# Altium PCB PCB1.PcbDoc
Units mm, origin at the board's own origin, x right, y up, seen from the top; angles counter-clockwise.
Board outline 152.4 x 101.6 mm, 2 copper layers (Top Layer, Bottom Layer); 25 components, 56 nets, 148 pads, 1 vias.
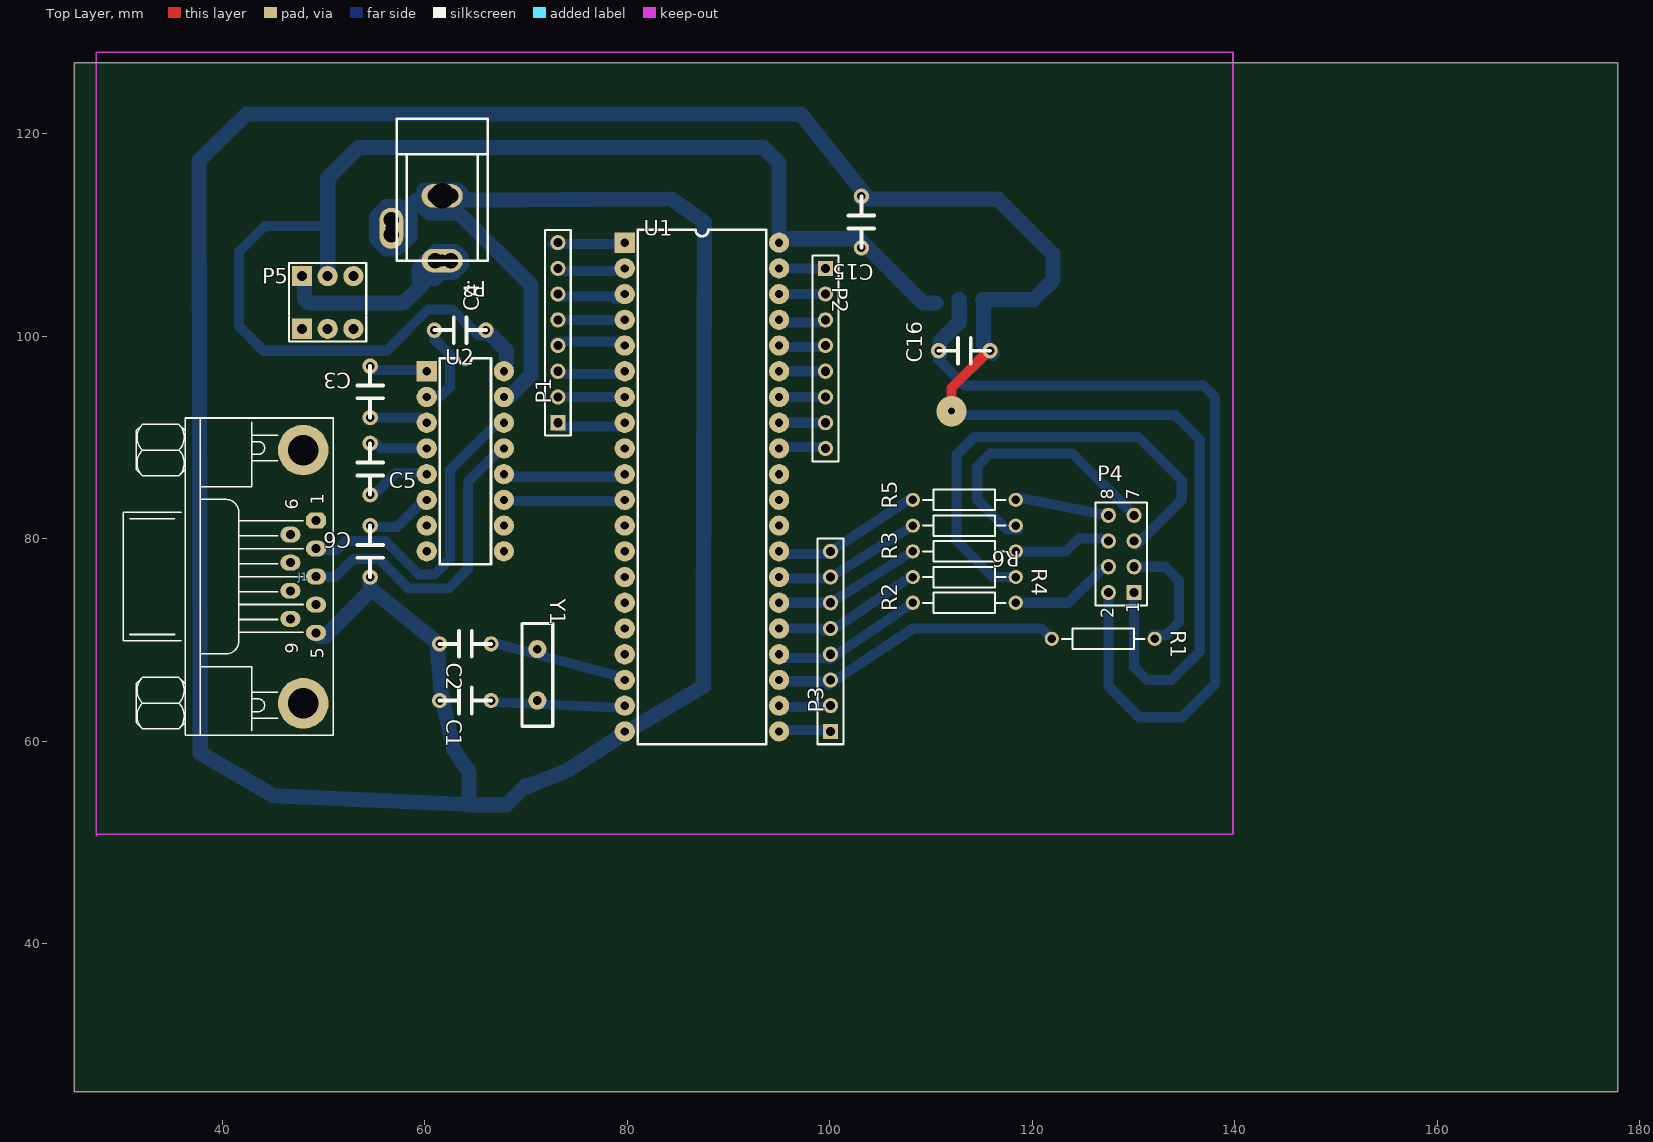
[diagram p0: Top Layer view]
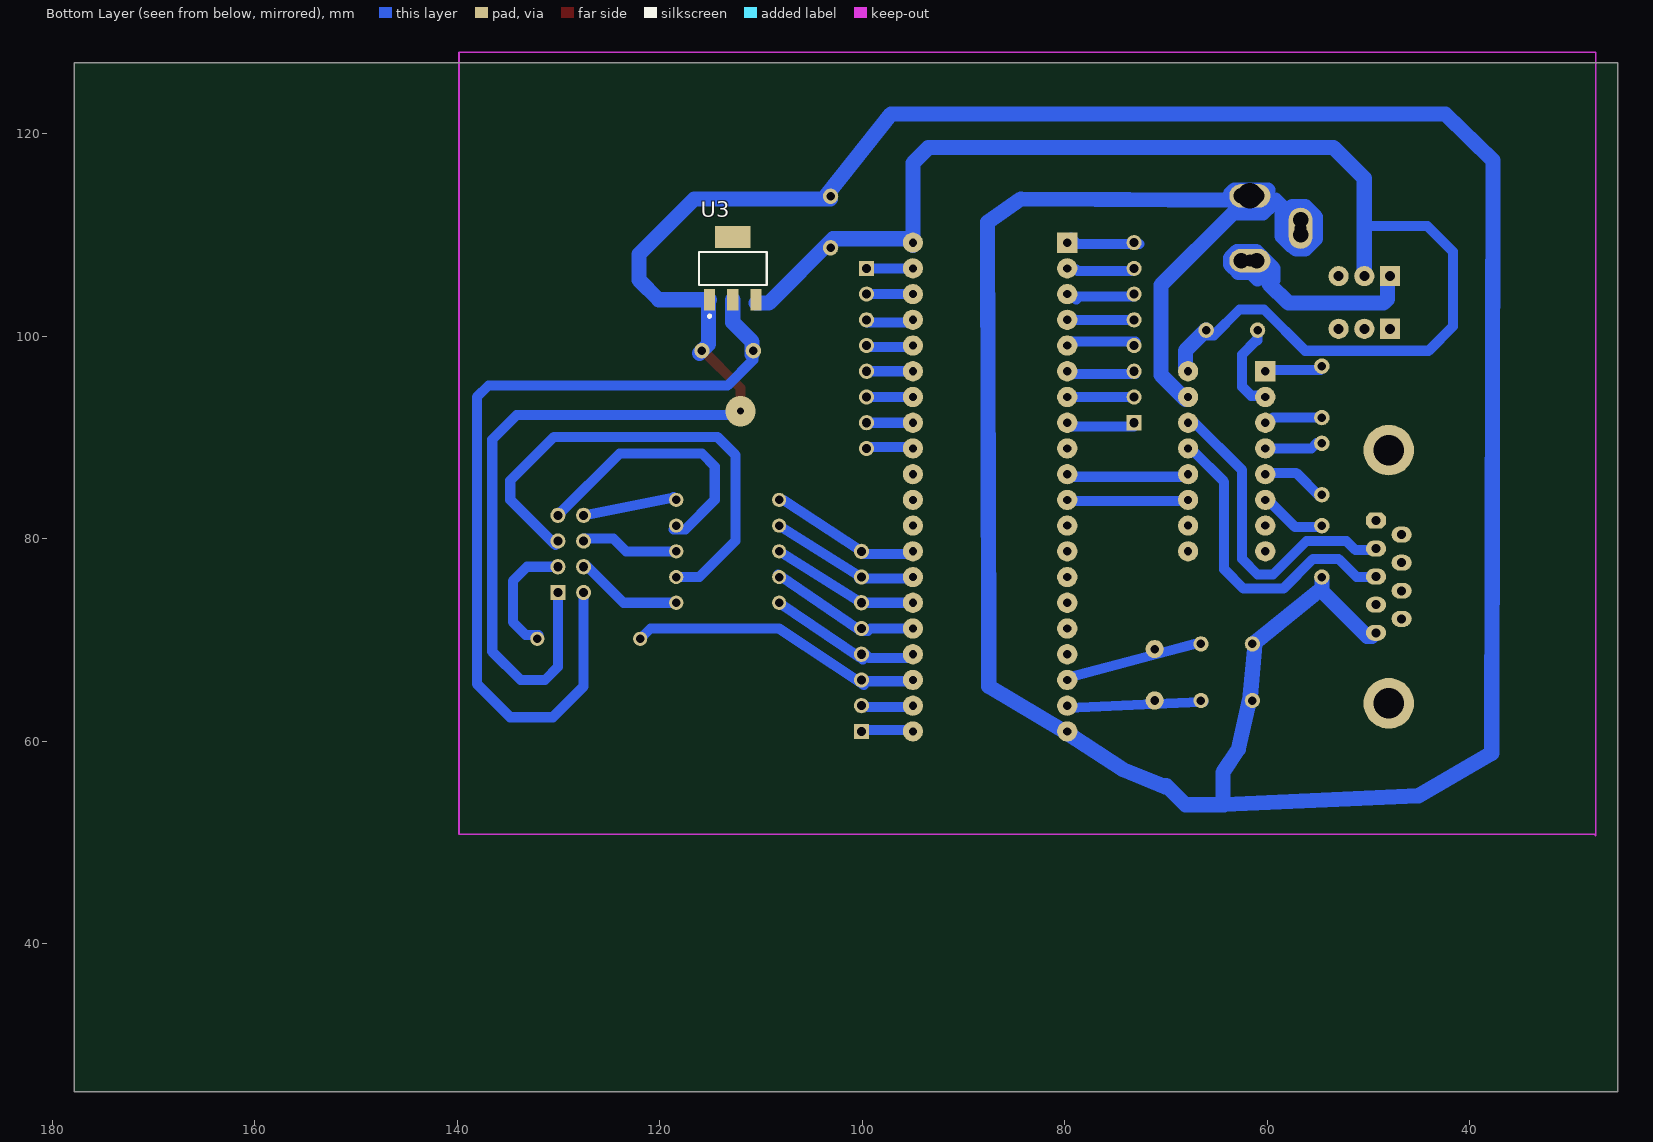
[diagram p1: Bottom Layer view, seen from below]

## Layer stack, top to bottom
Top Layer: signal copper 0.0356
Dielectric: dielectric 0.32, FR-4, Dk 4.8
Bottom Layer: signal copper 0.0356

## Board outline
25.4,25.4 177.8,25.4 177.8,127 25.4,127

## Design rules (kind name [scope] priority, off if disabled: settings)
Clearance [All] p1: gap=0.254
ComponentClearance [All] p1: gap=0.254 collisioncheckmode=3 verticalgap=0.254
PolygonConnect [All] p1: connectstyle=Relief reliefconductorwidth=0.254 reliefentries=4 polygonreliefangle="90 Angle"
RoutingVias [All] p1: holewidth=0.711 width=1.27 viastyle="Through Hole" minholewidth=0.711 minwidth=1.27 maxholewidth=0.711 maxwidth=1.27
SolderMaskExpansion [All] p1: expansion=0.102
TestPointUsage [All] p1: valid=0 allowmultiple=FALSE
Testpoint [All] p1: side=15 testpointundercomponent=TRUE minsize=1.016 maxsize=2.54 preferedsize=1.524 minholesize=0 maxholesize=1.016 preferedholesize=0.813 testpointgrid=0.025 style=1023 order=0-112345678
Width [All] p1: maxlimit=5 minlimit=0.254 preferedwidth=0.254 minimp=50.000000 maximp=50.000000 favimp=50.000000
18 further rules are at their usual default settings.

## Components (designator, comment, footprint, x,y, rotation, side; value= is the part's Value field where it differs from the comment)
C1 "33pF" c0.2 61.468,64.008 r270 top
C2 "33pF" c0.2 61.468,69.596 r270 top
C3 "0.1uF" C0.2 54.61,97.028 r180 top
C4 "0.1uF" C0.2 66.04,100.584 r90 top
C5 "0.1uF" C0.2 54.61,84.328 r0 top
C6 "0.1uF" C0.2 54.61,81.28 r180 top
C15 "33pF" c0.2 103.124,113.792 r180 top
C16 "33pF" c0.2 115.824,98.552 r90 top
J1 "DB9" RS232 49.276,81.788 r180 top
P1 "Header 8" HDR1X8 73.152,91.44 r90 top
P2 "Header 8" HDR1X8 99.568,106.68 r270 top
P3 "Header 8" HDR1X8 100.076,60.96 r90 top
P4 "Header 4X2" HDR2X4 130.048,74.676 r90 top
P5 "Header 3X2" KZ 48.26,116.332 r0 top
P? "Header 3" Power_In 64.008,114.3 r270 top
R1 "Res2" AXIAL-0.4 127,70.104 r0 top
R2 "Res2" AXIAL-0.4 113.284,73.66 r180 top
R3 "Res2" AXIAL-0.4 113.284,78.74 r180 top
R4 "Res2" AXIAL-0.4 113.284,76.2 r0 top
R5 "Res2" AXIAL-0.4 113.284,83.82 r180 top
R6 "Res2" AXIAL-0.4 113.284,81.28 r0 top
U1 "8031" DIP40 79.756,109.22 r0 top
U2 "MAX232-2" DIP16 60.198,96.52 r0 top
U3 "AMS1117" SOT223 112.776,106.68 r180 bottom
Y1 "11.0596MHz" XTAL-1 71.12,69.088 r270 top

## Footprints (in the part's own frame and the unit in brackets; to place one, negate y for a bottom-side part, rotate by r counter-clockwise, add the part's x,y. Pads: shape width x height; smd on the part's side, far side on the other; paste and mask are expansions set on the pad)
AXIAL-0.4 [mm] "Resistor; 2 Leads"
  round 1.4 hole 0.85: 1(-5.08,0) 2(5.08,0)
  silkscreen extent -4.06,-1.02 4.06,1.02
c0.2 [mil]
  round 60 hole 33: 1(0,0) 2(0,200)
  silkscreen extent -50,0 50,200
C0.2 [mil]
  round 60 hole 33: 1(0,0) 2(0,200)
  silkscreen extent -50,0 50,200
DIP16 [mm]
  rect 2x2 hole 0.813: 1(0,0)
  round 2 hole 0.813: 2(0,-2.54) 3(0,-5.08) 4(0,-7.62) 5(0,-10.16) 6(0,-12.7) 7(0,-15.24) 8(0,-17.78) 9(7.62,-17.78) 10(7.62,-15.24) 11(7.62,-12.7) 12(7.62,-10.16) 13(7.62,-7.62) 14(7.62,-5.08) 15(7.62,-2.54) 16(7.62,0)
  silkscreen extent 1.27,-19.05 6.35,1.27
DIP40 [mm]
  rect 2x2 hole 0.813: 1(0,0)
  round 2 hole 0.813: 2(0,-2.54) 3(0,-5.08) 4(0,-7.62) 5(0,-10.16) 6(0,-12.7) 7(0,-15.24) 8(0,-17.78) 9(0,-20.32) 10(0,-22.86) 11(0,-25.4) 12(0,-27.94) 13(0,-30.48) 14(0,-33.02) 15(0,-35.56) 16(0,-38.1) 17(0,-40.64) 18(0,-43.18) 19(0,-45.72) 20(0,-48.26) 21(15.24,-48.26) 22(15.24,-45.72) 23(15.24,-43.18) 24(15.24,-40.64) 25(15.24,-38.1) 26(15.24,-35.56) 27(15.24,-33.02) 28(15.24,-30.48) 29(15.24,-27.94) 30(15.24,-25.4) 31(15.24,-22.86) 32(15.24,-20.32) 33(15.24,-17.78) 34(15.24,-15.24) 35(15.24,-12.7) 36(15.24,-10.16) 37(15.24,-7.62) 38(15.24,-5.08) 39(15.24,-2.54) 40(15.24,0)
  silkscreen extent 1.27,-49.53 13.97,1.27
HDR1X8 [mm] "Connector; Header; 8 Position"
  rect 1.5x1.5 hole 0.9: 1(0,0)
  round 1.5 hole 0.9: 2(2.54,0) 3(5.08,0) 4(7.62,0) 5(10.16,0) 6(12.7,0) 7(15.24,0) 8(17.78,0)
  silkscreen extent -1.27,-1.27 19.05,1.27
HDR2X4 [mm] "Connector; Header; 4x2 Position"
  rect 1.5x1.5 hole 0.9: 1(0,0)
  round 1.5 hole 0.9: 2(0,2.54) 3(2.54,0) 4(2.54,2.54) 5(5.08,0) 6(5.08,2.54) 7(7.62,0) 8(7.62,2.54)
  silkscreen extent -1.27,-1.27 8.89,3.81
KZ [mm]
  rect 2x2 hole 1: 1(-0.381,-10.414) 4(-0.381,-15.621)
  round 2 hole 1: 2(2.159,-10.414) 3(4.699,-10.414) 5(2.159,-15.621) 6(4.699,-15.621)
  silkscreen extent -1.65,-16.89 5.97,-9.14
Power_In [mil]
  rect 60x60 hole 60: 1(270,-116) 2(170,-287) 3(18,-57)
  oval 92x160 hole 47: 1(270,-90)
  rect 50x60 hole 60: 1(270,-57) 3(18,-116)
  rect 60x50 hole 60: 2(111,-287)
  oval 160x92 hole 47: 2(144,-287)
  oval 92x160 hole 100: 3(18,-90)
  silkscreen extent -281,-267 270,87
RS232 [mil]
  oct 78.74x62 hole 35: 1(0,0)
  oval 78.74x62 hole 35: 2(0,109.17) 3(0,218.33) 4(0,327.5) 5(0,436.67) 6(100,55) 7(100,164.17) 8(100,273.33) 9(100,382.5)
  round 196.67 hole 118.33: BO1(50,710.83) BO2(50,-273.33)
  silkscreen extent -67,-398 750,835
SOT223 [mm] "SOT-223/SC-73; 4 Leads; Body 6.7 x 7.3 mm, inc. leads (LxW max)"
  rect 1.1x2.15 smd: 1(-2.3,-3.1) 2(0,-3.1) 3(2.3,-3.1)
  rect 3.5x2.15 smd: 4(0,3.1)
  silkscreen extent -3.35,-4.85 3.35,1.63
XTAL-1 [mm]
  round 1.8 hole 0.85: 1(0,0) 2(5.08,0)
  silkscreen extent -2.54,-1.52 7.62,1.52

## Part data
C1 C2 C3 C4 C5 C6 C15 C16: library part CAP, "Capacitor"
P1 P2 P3: "Header, 8-Pin"
P4: "Header, 4-Pin, Dual row"
P5: "Header, 3-Pin, Dual row"
P?: "Header, 3-Pin"
R1 R2 R3 R4 R5 R6: "Resistor"
U2: library part MAX3232-2
U3: library part COMPONENT_2
Y1: library part CRYSTAL, "Crystal"

## Via types
v1: diameter 3, hole 0.7, Top Layer to Bottom Layer, 1 vias

## Nets (pads, with @x,y where several pads share a name; then routed paths per layer and width w, separated by ;. In a path a pad name is that pad's centre, name@x,y a point inside that pad or via, vN(x,y) a via of type N, cw(c..) or ccw(c..) an arc to the next point about the centre after c; other vN are vias at no path point)
3.3: C16.2 P4.2 U3.2 | length 85.5
  Bottom Layer w1: 110.744,97.663 113.284,95.123 136.906,95.123 138.049,93.98 138.049,65.659 134.747,62.357 130.556,62.357 127.508,65.405 P4.2@127.508,74.422
  Bottom Layer w1.5: C16.2@110.871,98.171 110.871,99.441 112.776,101.346 U3.2
DGND: C1.1 C2.1 C6.2 C15.1 C16.1 J1.5 P4.1 P?.2 P?.3 U1.20 U2.15 U3.1 | length 440
  Top Layer w1: v1(112.014,92.583) 112.014,94.869 C16.1@115.951,98.806
  Bottom Layer w1: v1@112.141,92.456 112.395,92.202 134.112,92.202 136.525,89.789 136.525,68.834 133.731,66.04 131.318,66.04 130.048,67.31 P4.1
  Bottom Layer w1.5: J1.5@49.657,70.358 50.165,70.358 54.61,74.803 C6.2@54.61,75.819 ; 54.61,75.057 61.214,69.723 61.227,69.575 C1.1@61.682,64.46 ; P?.2@56.896,110.236 P?.2@56.896,111.125 ; 57.531,112.776 56.718,112.776 56.261,112.776 55.245,111.76 55.245,109.601 56.261,108.585 57.15,108.585 57.531,108.966 57.658,108.966 58.547,109.855 58.547,112.014 ; 58.039,112.268 59.182,113.411 59.69,113.411 ; 59.69,112.903 60.425,112.168 63.346,112.168 70.485,105.029 70.485,96.139 U2.15@68.072,93.726 ; P?.3@59.944,114.427 63.246,114.427 P?.3@63.627,114.046 ; C1.1@61.722,64.008 61.72,64.03 C1.1@61.682,64.46 ; P?.3@62.611,113.411 84.328,113.538 87.63,111.252 87.503,69.723 87.503,65.405 U1.20@80.01,60.96 ; 64.262,53.721 68.072,53.721 69.977,55.626 ; 70.104,55.499 74.168,57.15 U1.20@79.629,60.706 ; C15.1@103.124,113.538 116.586,113.538 122.047,108.077 122.047,105.537 120.09,103.58 U3.1 ; C15.1@103.505,113.919 103.42,114.027 97.155,121.92 42.418,121.92 37.719,117.348 37.846,58.801 45.085,54.61 64.262,53.727 64.389,53.721 64.389,56.896 62.865,59.182 61.768,64.075 C1.1@61.682,64.46 ; U3.1@115.189,103.251 115.189,99.187 C16.1@116.078,98.298
NetC3_1: C3.1 U2.1 | length 5.2
  Bottom Layer w1: C3.1@54.737,96.647 U2.1@59.944,96.647
NetC3_2: C3.2 U2.3 | length 5.7
  Bottom Layer w1: C3.2 59.436,91.948 U2.3@60.071,91.313
NetC4_2: C4.2 U2.2 | length 8.7
  Bottom Layer w1: U2.2@60.452,94.107 61.595,94.107 62.484,94.996 62.484,98.171 61.087,99.568 60.96,99.568 C4.2
NetC5_1: C5.1 U2.5 | length 6
  Bottom Layer w1: C5.1@54.864,84.201 57.15,86.487 U2.5@59.944,86.487
NetC5_2: C5.2 U2.4 | length 5.3
  Bottom Layer w1: C5.2@55.118,89.408 55.626,88.9 U2.4
NetC6_1: C6.1 U2.6 | length 5.5
  Bottom Layer w1: C6.1@54.991,81.153 57.277,81.153 U2.6@59.563,83.439
NetJ1_2: J1.2 U2.14 | length 30.6
  Bottom Layer w1: J1.2@49.657,78.867 51.308,78.867 52.197,79.756 56.134,79.756 59.436,76.454 60.96,76.454 62.484,77.978 62.484,86.741 U2.14@67.183,91.44
NetJ1_3: J1.3 U2.13 | length 30.3
  Bottom Layer w1: J1.3@49.657,76.2 51.181,76.2 52.959,77.978 55.499,77.978 58.42,75.057 62.357,75.057 64.262,76.962 64.262,85.598 U2.13@67.31,88.646
NetP4_3: P4.3 R1.2 | length 12.2
  Bottom Layer w1: P4.3 133.096,77.216 134.493,75.819 134.493,71.755 133.223,70.485 R1.2@131.953,70.485
NetP4_4: P4.4 R2.1 | length 10.4
  Bottom Layer w1: R2.1 123.571,73.66 P4.4@127.254,77.343
NetP4_5: P4.5 R4.2 | length 48.8
  Bottom Layer w1: R4.2 116.078,76.2 112.522,79.756 112.522,88.265 114.3,90.043 130.429,90.043 134.747,85.725 134.747,83.82 P4.5@130.302,79.375
NetP4_6: P4.6 R3.1 | length 9.7
  Bottom Layer w1: R3.1 123.317,78.74 124.587,80.01 P4.6@127.508,80.01
NetP4_7: P4.7 R6.2 | length 27.1
  Bottom Layer w1: R6.2@118.618,80.899 117.475,80.899 114.554,83.82 114.554,87.122 115.824,88.392 123.952,88.392 P4.7
NetP4_8: P4.8 R5.1 | length 9.1
  Bottom Layer w1: R5.1@118.618,84.074 P4.8
SC_A8: P3.1 U1.21 | length 4.2
  Bottom Layer w1: U1.21@95.504,61.087 P3.1@99.695,61.087
SC_A9: P3.2 U1.22 | length 4.2
  Bottom Layer w1: U1.22@95.25,63.373 P3.2@99.441,63.373
SC_A10: P3.3 R1.1 U1.23 | length 29.1
  Bottom Layer w1: U1.23@95.377,65.913 99.949,65.913 P3.3@100.076,65.786 ; P3.3@99.822,65.532 100.232,65.806 108.204,71.12 120.904,71.12 R1.1@122.047,69.977
SC_A11: P3.4 R2.2 U1.24 | length 15.1
  Bottom Layer w1: U1.24@94.742,68.199 99.314,68.199 P3.4@99.695,68.58 ; P3.4@99.949,68.072 100.272,68.291 R2.2
SC_A12: P3.5 R4.1 U1.25 | length 14.5
  Bottom Layer w1: U1.25 99.187,71.12 99.441,70.866 P3.5@99.695,70.866 ; P3.5@100.33,70.993 108.126,76.314 R4.1@108.331,76.454
SC_A13: P3.6 R3.2 U1.26 | length 14.7
  Bottom Layer w1: U1.26@94.742,73.66 98.806,73.66 ; 99.06,73.66 P3.6 R3.2
SC_A14: P3.7 R6.1 U1.27 | length 14.7
  Bottom Layer w1: U1.27@95.377,76.073 P3.7@100.33,76.073 ; P3.7@99.949,76.073 100.097,76.166 R6.1
SC_A15: P3.8 R5.2 U1.28 | length 13.6
  Bottom Layer w1: U1.28@95.631,78.486 P3.8@99.949,78.486 ; P3.8 R5.2@107.823,83.82
SC_ALE: U1.30
SC_D0: P2.1 U1.39 | length 4.8
  Bottom Layer w1: U1.39@94.742,106.68 P2.1
SC_D1: P2.2 U1.38 | length 3.6
  Bottom Layer w1: U1.38@95.758,104.14 P2.2@99.314,104.14
SC_D2: P2.3 U1.37 | length 4.7
  Bottom Layer w1: U1.37@94.869,101.346 P2.3@99.568,101.346
SC_D3: P2.4 U1.36 | length 3.6
  Bottom Layer w1: U1.36@95.504,98.933 P2.4@99.06,98.933
SC_D4: P2.5 U1.35 | length 3.9
  Bottom Layer w1: U1.35@95.631,96.52 P2.5
SC_D5: P2.6 U1.34 | length 4.3
  Bottom Layer w1: U1.34@95.25,93.98 P2.6
SC_D6: P2.7 U1.33 | length 4.6
  Bottom Layer w1: U1.33 P2.7
SC_D7: P2.8 U1.32 | length 4.2
  Bottom Layer w1: U1.32@95.25,89.027 P2.8@99.441,89.027
SC_EA: U1.31
SC_INT0: U1.12
SC_INT1: U1.13
SC_NRD: U1.17
SC_NWR: U1.16
SC_P10: P1.8 U1.1 | length 7
  Bottom Layer w1: P1.8@72.644,109.093 78.74,109.093 U1.1@79.375,109.728
SC_P11: P1.7 U1.2 | length 5.6
  Bottom Layer w1: P1.7@73.279,106.426 78.74,106.426 U1.2@78.867,106.553
SC_P12: P1.6 U1.3 | length 5.8
  Bottom Layer w1: P1.6@73.152,103.886 78.613,103.886 78.867,103.632
SC_P13: P1.5 U1.4 | length 6
  Bottom Layer w1: P1.5 78.994,101.6 U1.4@79.121,101.727
SC_P14: P1.4 U1.5 | length 6.9
  Bottom Layer w1: P1.4@73.025,99.441 79.375,99.441 U1.5
SC_P15: P1.3 U1.6 | length 6.5
  Bottom Layer w1: P1.3@73.025,96.266 U1.6@79.502,96.266
SC_P16: P1.2 U1.7 | length 6.5
  Bottom Layer w1: P1.2@73.533,93.98 79.629,93.98 U1.7@79.883,93.726
SC_P17: P1.1 U1.8 | length 6.6
  Bottom Layer w1: P1.1@73.152,91.059 79.375,91.059 U1.8@79.629,91.313
SC_PSEN: U1.29
SC_RST: U1.9
SC_RXD: U1.10 U2.12 | length 11.3
  Bottom Layer w1: U2.12@68.199,86.106 79.121,86.106 U1.10@79.375,86.36
SC_T0: U1.14
SC_T1: U1.15
SC_TXD: U1.11 U2.11 | length 11.1
  Bottom Layer w1: U2.11@68.326,83.693 79.248,83.693 U1.11@79.375,83.82
SC_XIN: C1.2 U1.19 Y1.2 | length 13.6
  Bottom Layer w1: C1.2@66.294,63.881 66.542,63.869 71.104,63.656 79.744,63.252 U1.19@79.883,63.246
SC_XOUT: C2.2 U1.18 Y1.1 | length 12.9
  Bottom Layer w1: C2.2@67.183,69.596 70.987,68.587 U1.18@79.629,66.294
VCC: P5.1 P?.1 | length 25.5
  Bottom Layer w1.5: P5.1@48.133,105.664 48.133,103.632 48.514,103.251 57.912,103.251 59.817,105.156 ; 59.436,105.537 59.436,106.68 61.087,108.331 62.992,108.331 63.627,107.696 63.627,107.061 62.865,106.299 61.595,106.299 60.96,105.664 ; 60.198,106.426 60.706,105.918
VDD5.0V: C4.1 C15.2 P5.2 U1.40 U2.16 U3.3 | length 131.9
  Bottom Layer w1: 50.038,110.871 44.196,110.871 41.656,108.331 41.656,100.965 44.069,98.552 56.261,98.552 60.325,102.616 62.738,102.616 65.278,100.076 C4.1@66.421,100.076
  Bottom Layer w1.5: P5.2 50.419,115.57 53.467,118.618 93.472,118.618 94.996,117.094 U1.40@94.996,108.966 ; C4.1 68.072,98.552 U2.16@68.072,96.647 ; U1.40@95.504,109.601 102.87,109.601 109.22,103.251 U3.3@110.49,103.251
pads on no net: J1.1 J1.4 J1.6 J1.7 J1.8 J1.9 J1.BO1 J1.BO2 P5.3 P5.4 P5.5 P5.6 U2.7 U2.8 U2.9 U2.10 U3.4

## Keep-outs
Keep-Out Layer:
  lines w0.176: 27.559,50.673 27.559,128.016 139.827,128.016 139.827,50.8 31.496,50.8 27.686,50.8 27.559,50.673

## Text inside footprints (layer, text, board x,y; h text height)
J1: Top Overlay "6" at 47.498,82.846 h1.27 r90; Top Overlay "1" at 50.038,83.354 h1.27 r90; Top Overlay "5" at 50.038,68.114 h1.27 r90; Top Overlay "9" at 47.498,68.622 h1.27 r90
P4: Top Overlay "8" at 128.016,83.82 h1.27 r90; Top Overlay "7" at 130.556,83.82 h1.27 r90; Top Overlay "1" at 130.556,72.644 h1.27 r90; Top Overlay "2" at 128.016,72.136 h1.27 r90